# Altium PCB tablo tara3.PcbDoc
Units mm, origin at the board's own origin, x right, y up, seen from the top; angles counter-clockwise.
Board outline 151 x 86.38 mm, 2 copper layers (Top Layer, Bottom Layer); 11 components, 8 nets, 29 pads, 0 vias.
Unrouted connection lines stored in the file: 2.
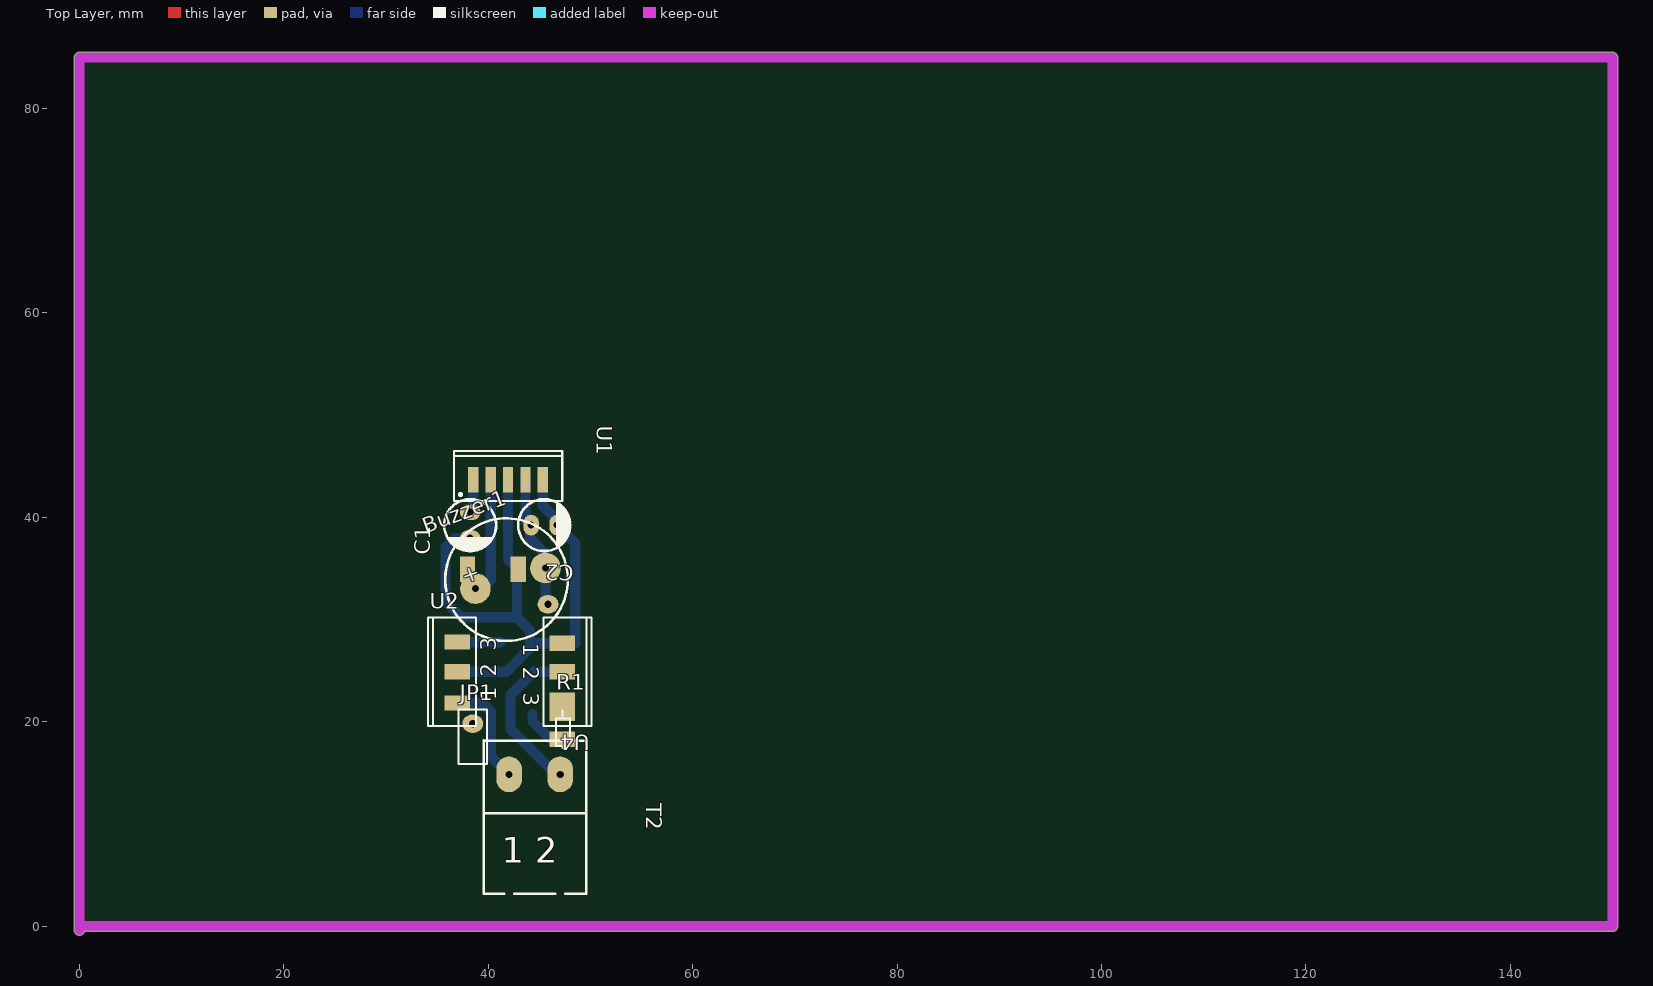
[diagram p0: Top Layer view]
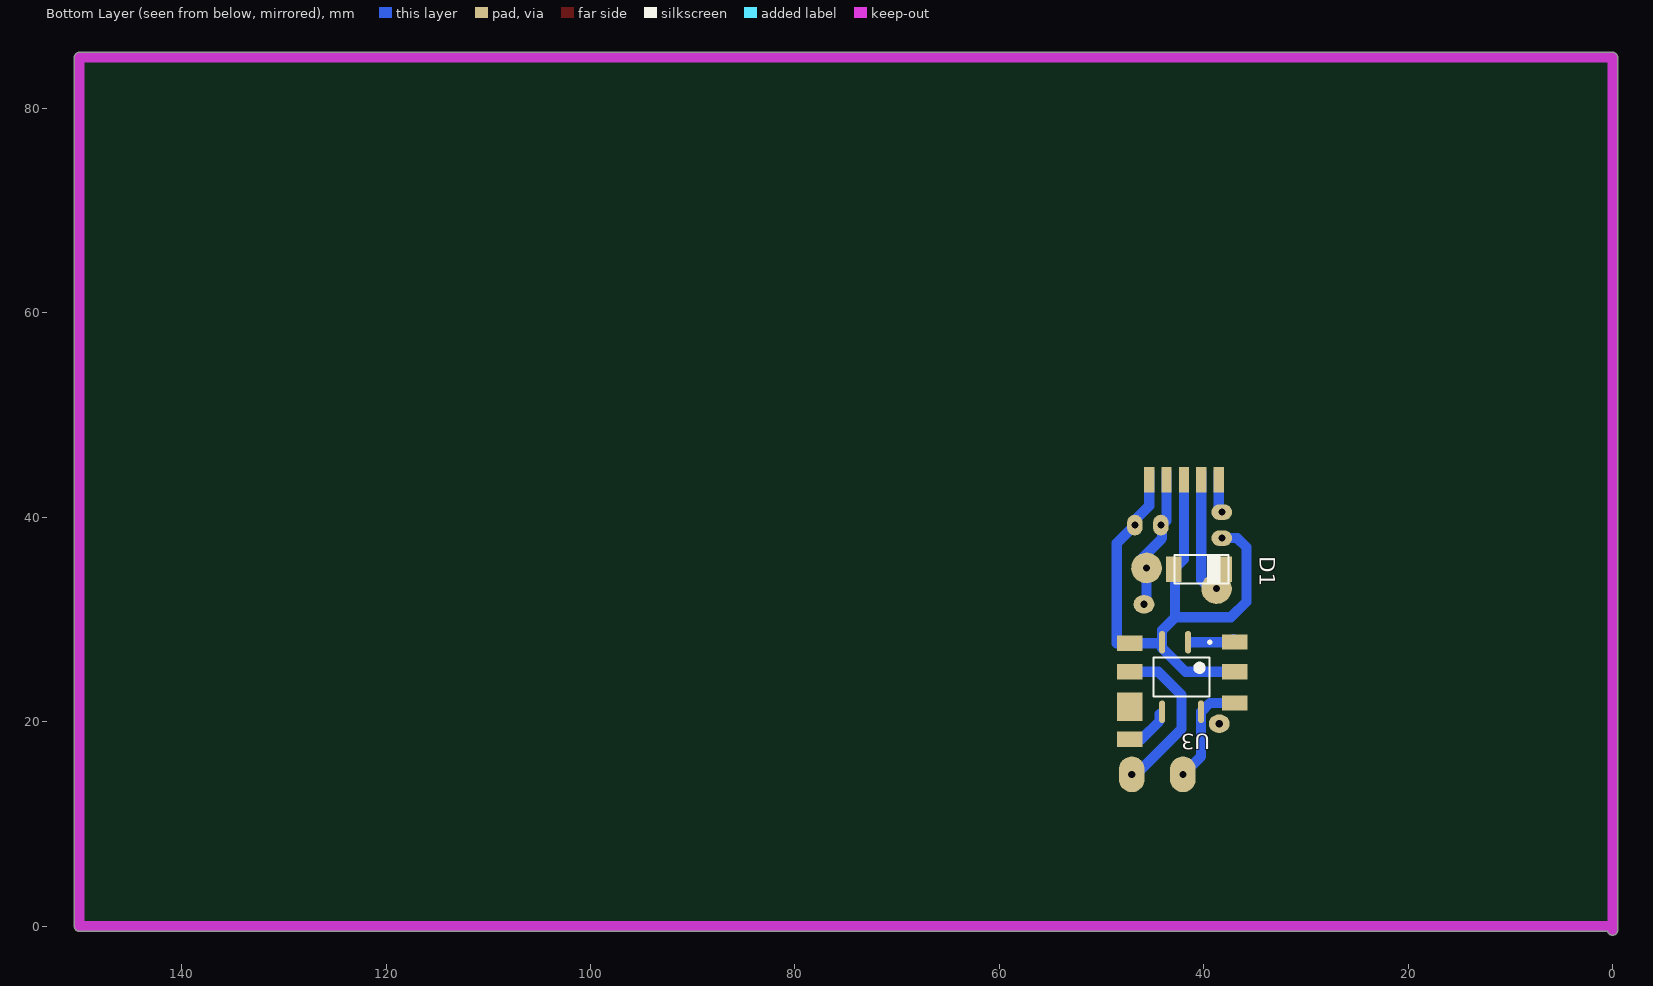
[diagram p1: Bottom Layer view, seen from below]

## Layer stack, top to bottom
Top Solder: solder mask 0.0102, Solder Resist, Dk 3.5
Top Layer: signal copper 0.0356
Dielectric 1: dielectric 0.32, FR-4, Dk 4.8
Bottom Layer: signal copper 0.0356
Bottom Solder: solder mask 0.0102, Solder Resist, Dk 3.5

## Board outline
-0.5,-0.381 -0.5,85 cw(c0,85) 0,85.5 150,85.5 cw(c150,85) 150.5,85 150.5,0 cw(c150,0) 150,-0.5 0.486,-0.5 cw(c0,-0.381)

## Design rules (kind name [scope] priority, off if disabled: settings)
Clearance Clearance_1 [InPolygon] p1: gap=0.8 ignorepadtopadclearanceinfootprint=FALSE
Clearance [All] p2: gap=0.254 ignorepadtopadclearanceinfootprint=FALSE except(0: Arc-Hole Track-Hole SMDPad-Hole THPad-Hole Via-Hole Fill-Hole Poly-Hole Region-Hole Text-Hole)
PolygonConnect [All] p1: connectstyle=Relief reliefconductorwidth=0.254 reliefentries=4 polygonreliefangle="90 Angle" airgapwidth=0.254
RoomDefinition "tablo tara3" [InComponentClass('tablo tara3')] p1: confinementstyle=ConfineIn formatcopy=TRUE lockcomponents=FALSE outline 144.907,-4.953 247.904,-4.953 247.904,23.114 144.907,23.114
RoutingLayers [All] p1: top layer_v5=FALSE bottom layer_v5=TRUE
RoutingVias [All] p1: holewidth=0.711 width=2.5 viastyle="Through Hole" minholewidth=0.711 minwidth=1.27 maxholewidth=0.711 maxwidth=2
SolderMaskExpansion [All] p1: expansion=0.102
Width [All] p1: maxlimit=3 minlimit=0.5 preferedwidth=1
29 further rules are at their usual default settings.

## Components (designator, comment, footprint, x,y, rotation, side; value= is the part's Value field where it differs from the comment)
Buzzer1 "Buzzer" BUZZER 41.783,33.909 r20 top
C1 "Value" ELEC-CAP-RAD10-20 38.227,39.243 r90 top
C2 "Value" ELEC-CAP-RAD10-20 45.466,39.243 r180 top
D1 "MODEL" DO-41 43.942,34.925 r180 bottom
JP1 "Jumper" "Header 2X1" 38.481,18.542 r90 top
R1 "Res2" Res50 47.244,20.193 r90 top
T2 "Phoenix terminal" "phoenix terminal 2" 39.544,3.175 r0 top
U1 "LM2576T-3.3" T05A 41.939,43.688 r0 top
U2 "L4931CV30" TO-220A#1 36.957,24.892 r90 top
U3 "ATtiny15L-1SC" 8S2_N 42.164,24.384 r270 bottom
U4 "L4931CV30" TO-220A#2 47.244,24.892 r270 top

## Footprints (in the part's own frame and the unit in brackets; to place one, negate y for a bottom-side part, rotate by r counter-clockwise, add the part's x,y. Pads: shape width x height; smd on the part's side, far side on the other; paste and mask are expansions set on the pad)
8S2_N [mm] "SOP, 8-Leads, Body 5.3x5.3mm, Pitch 1.27mm, IPC Medium Density"
  oval 2.2x0.6 smd: 2(-3.4,0.635) 4(-3.4,-1.905) 5(3.4,-1.905) 8(3.4,1.905)
  silkscreen extent -3.52,-2.75 1.9,2.88, body extent -2.73,-2.75 2.73,2.75, height 2.16
BUZZER [mm] "BUZZER"
  round 3 hole 0.7: 1(-3.16,0.214) 2(3.971,-0.229)
  silkscreen extent -6,-6 6,6
DO-41 [mm]
  rect 1.5x2.5 all layers, no hole: 1(1.016,0) 2(5.969,0)
  silkscreen extent 1.1,-1.5 6.35,1.5, body extent -0.41,-1.33 8,1.33, height 3.33
ELEC-CAP-RAD10-20 [mil]
  oval 60x80 hole 27.56: 1(-50,0) 2(50,0)
  silkscreen extent -100,-100 100,100, body extent -124,-124 124,124, height 404
"Header 2X1" [mil]
  oval 70x80 hole 27.56: 1(510,-290) 2(50,0)
  silkscreen extent -105,-55 105,55, body extent -100,-50 100,50, height 374
"phoenix terminal 2" [mm] "2 terminals"
  oval 2.5x3.5 hole 0.7: 1(2.493,11.684) 2(7.493,11.684)
  silkscreen extent 0,0 10.03,15
Res50 [mm] "50mm Pin Spacing"
  rect 1.5x2.5 all layers, no hole: 1(-1.905,0) 2(0.635,0)
  silkscreen extent -2.77,-0.76 0.89,0.64
T05A [mm] "TO, Thru-Hole, Vertical, Heatsink Mounted; 5 In-Line Leads; Pitch 1.70 mm"
  rect 1x2.5 all layers, no hole: 1(-3.4,0) 2(-1.7,0) 3(0,0) 4(1.7,0) 5(3.4,0)
  silkscreen extent -5.3,-2.1 5.3,2.8, body extent -5.35,-2.15 5.35,2.85, height 19.6
TO-220A#1 [mm] "TO, Thru-Hole, Vertical, Heatsink Mounted; 3 In-Line Leads; Pitch 2.54 mm"
  rect 1.5x2.5 all layers, no hole: 1(-3.048,0) 2(0,0) 3(2.921,0)
  silkscreen extent -5.3,-1.85 5.3,2.85
TO-220A#2 [mm] "TO, Thru-Hole, Vertical, Heatsink Mounted; 3 In-Line Leads; Pitch 2.54 mm"
  rect 1.5x2.5 all layers, no hole: 1(-2.794,0) 2(0,0) 3(2.794,0)
  silkscreen extent -5.3,-1.85 5.3,2.85

## Part data
C1 C2: library part "Capacitor Electrolytic", "Electrolytic Capacitor"
D1: library part Diode, "Diode", MODEL=1N4148
R1: "Resistor", LatestRevisionDate=17-Jul-2002, LatestRevisionNote="Re-released for DXP Platform.", PackageDescription="Axial Device, Thru-Hole; 2 Leads; 0.4 in Pin Spacing", PackageReference=AXIAL-0.4, Published=8-Jun-2000, Publisher="Altium Limited"
T2: library part "Phoenix terminal 2", "Terminal 2 Pin", ComponentLinkURL=www.picpars.com, Designer="Seyed Mohsen Ghasemain", E-mail=picpars@gmail.com
U1: "SIMPLE SWITCHER; 3A Step-Down Voltage Regulator", DigiKeyPartNumber=LM2576T-3.3NS-ND, Manufacturer="National Semiconductor", PackageTopMarking="NSUZXYTT*LM2576T*-3.3 P+", PowerWise=N, Code_JEDEC=TO-220-AB, ComponentLink1Description="LM2576 Datasheet", ComponentLink1URL=http://www.national.com/ds/LM/LM2576.pdf, ComponentLink2Description="LM2576 Web Page", ComponentLink2URL=http://www.national.com/pf/LM/LM2576.html, ComponentLink3Description="T05A Package Page", ComponentLink3URL=http://www.national.com/packaging/folders/t05a.html, CompType=Switcher, DatasheetVersion=Aug-2004, FirstPublished=4-Dec-2008, PackageDescription="TO-220, Molded, 5 Lead, Straight", PackageReference=T05A, PackageVersion="revJ, Jan-1992", PartNumber=LM2576T-3.3, PinCount=5, Publisher="Altium Limited", RoHS=Y
U2 U4: "250mA, Very Low Drop ( 0.4V) Voltage Regulator", ComponentLink1Description="Manufacturer Link", ComponentLink1URL=http://www.st.com/, ComponentLink2Description=Datasheet, ComponentLink2URL=http://www.st.com/stonline/products/literature/ds/4340/l4931abxx15.pdf, DatasheetVersion=Apr-1999, LatestRevisionDate=06-Jun-2005, LatestRevisionNote="PCB Pin sequence re-ordered.", PackageDescription="TO, Thru-Hole, Vertical, Heatsink Mounted; 3 In-Line Leads; Pitch 2.54 mm", PackageReference=TO-220A, PackageVersion=Jul-2004, Published=24-Aug-2001, Publisher="Altium Limited"
U3: "8-Bit AVR Microcontroller with 1K Byte of Flash Memory", Supplier Part Number 1=ATTINY15L-1SC-ND, ComponentLink1Description=Datasheet, ComponentLink1URL=http://www.atmel.com/dyn/resources/prod_documents/doc1187.pdf, ComponentLink2Description="Atmel.com Home", ComponentLink2URL=http://www.atmel.com, DatasheetVersion=1187E-AVR-06/02, LatestRevisionDate=16-Oct-2006, LatestRevisionNote="IPC-7351 Footprint Added.", PackageDescription="8-Lead, 0.208\" Body, Plastic Small Outline Package (EIAJ)", PackageReference=8S2, PackageVersion="revF, Apr-2008", Published=17-Sep-2003, Publisher="Altium Limited", Supplier 1=Digi-Key, Supplier 2=Mouser, Supplier Part Number 2=556-ATTINY15L1SC
Buzzer1: ComponentLinkURL=www.picpars.com, Designer="Seyed Mohsen Ghasemain"

## Nets (pads, with @x,y where several pads share a name; then routed paths per layer and width w, separated by ;. In a path a pad name is that pad's centre, name@x,y a point inside that pad or via, vN(x,y) a via of type N, cw(c..) or ccw(c..) an arc to the next point about the centre after c; other vN are vias at no path point)
bat: Buzzer1.2 C2.2 JP1.1 JP1.2 T2.1 U1.4 U2.1 U3.8 | length 24.8
  Bottom Layer w1: U2.1 39.399,21.844 U3.8 40.259,16.637 T2.1 ; U1.4@43.639,44.45 U1.4 43.639,39.673 44.069,39.243 44.069,37.973 45.974,36.068 Buzzer1.2@45.974,34.798 ; Buzzer1.2 45.593,31.75 JP1.1
GND: C1.1 C2.1 D1.1 U1.3 U1.5 U2.2 U3.4 U4.1 | length 63.1
  Bottom Layer w1: U2.2 41.783,24.892 44.069,27.178 U3.4 ; C1.1 36.703,37.973 35.814,37.084 35.814,31.75 37.338,30.226 42.799,30.226 ; U1.3 41.939,35.912 D1.1 ; D1.1@42.799,34.29 42.799,30.226 ; U1.5@45.339,44.45 U1.5 45.339,41.148 46.609,39.878 C2.1@46.609,39.243 ; C2.1 48.514,37.465 48.514,27.686 U4.1 44.167,27.686 U3.4 ; 42.799,30.226 44.069,28.956 U3.4
ir: U2.3 U3.2 | length 4.2
  Bottom Layer w1: U2.3@37.084,28.067 37.367,27.784 41.148,27.784
"led -": T2.2 U4.2 | length 16
  Bottom Layer w1: T2.2 46.609,14.859 42.164,19.304 42.164,22.606 44.45,24.892 U4.2
NetBuzzer1_1: Buzzer1.1 D1.2 U1.2 | length 14.3
  Bottom Layer w1: D1.2@37.782,34.353 39.121,33.015 39.121,32.775 40.239,33.893 U1.2 U1.2@40.239,44.45
NetC1_2: C1.2 U1.1 | length 4.1
  Bottom Layer w1: C1.2 38.539,40.825 U1.1 U1.1@38.539,44.45
NetR1_2: R1.2 U4.3
out: R1.1 U3.5 | length 4.3
  Bottom Layer w1: U3.5@44.323,20.73 44.323,20.066 46.101,18.288 R1.1

## Keep-outs
Keep-Out Layer:
  lines w1: 0,-0.381 0,85 150,85 150,0 0,0

## Text inside footprints (layer, text, board x,y; h text height)
Buzzer1: Top Overlay "+" at 37.682,33.481 h1.52 r20
T2: Top Overlay "1 2" at 41.322,6.223 h2.5
U2: Top Overlay "1" at 40.782,22.102 h1.5 r90; Top Overlay "2" at 40.782,24.392 h1.5 r90; Top Overlay "3" at 40.782,26.932 h1.5 r90
U4: Top Overlay "1" at 43.419,27.682 h1.5 r270; Top Overlay "2" at 43.419,25.392 h1.5 r270; Top Overlay "3" at 43.419,22.852 h1.5 r270